# Altium PCB STM32 Project 1B.PcbDoc
Units mm, origin at the board's own origin, x right, y up, seen from the top; angles counter-clockwise.
Board outline 45 x 45 mm, 2 copper layers (Top Layer, Bottom Layer), stack 0.695 mm thick; 47 components, 42 nets, 201 pads, 67 vias.
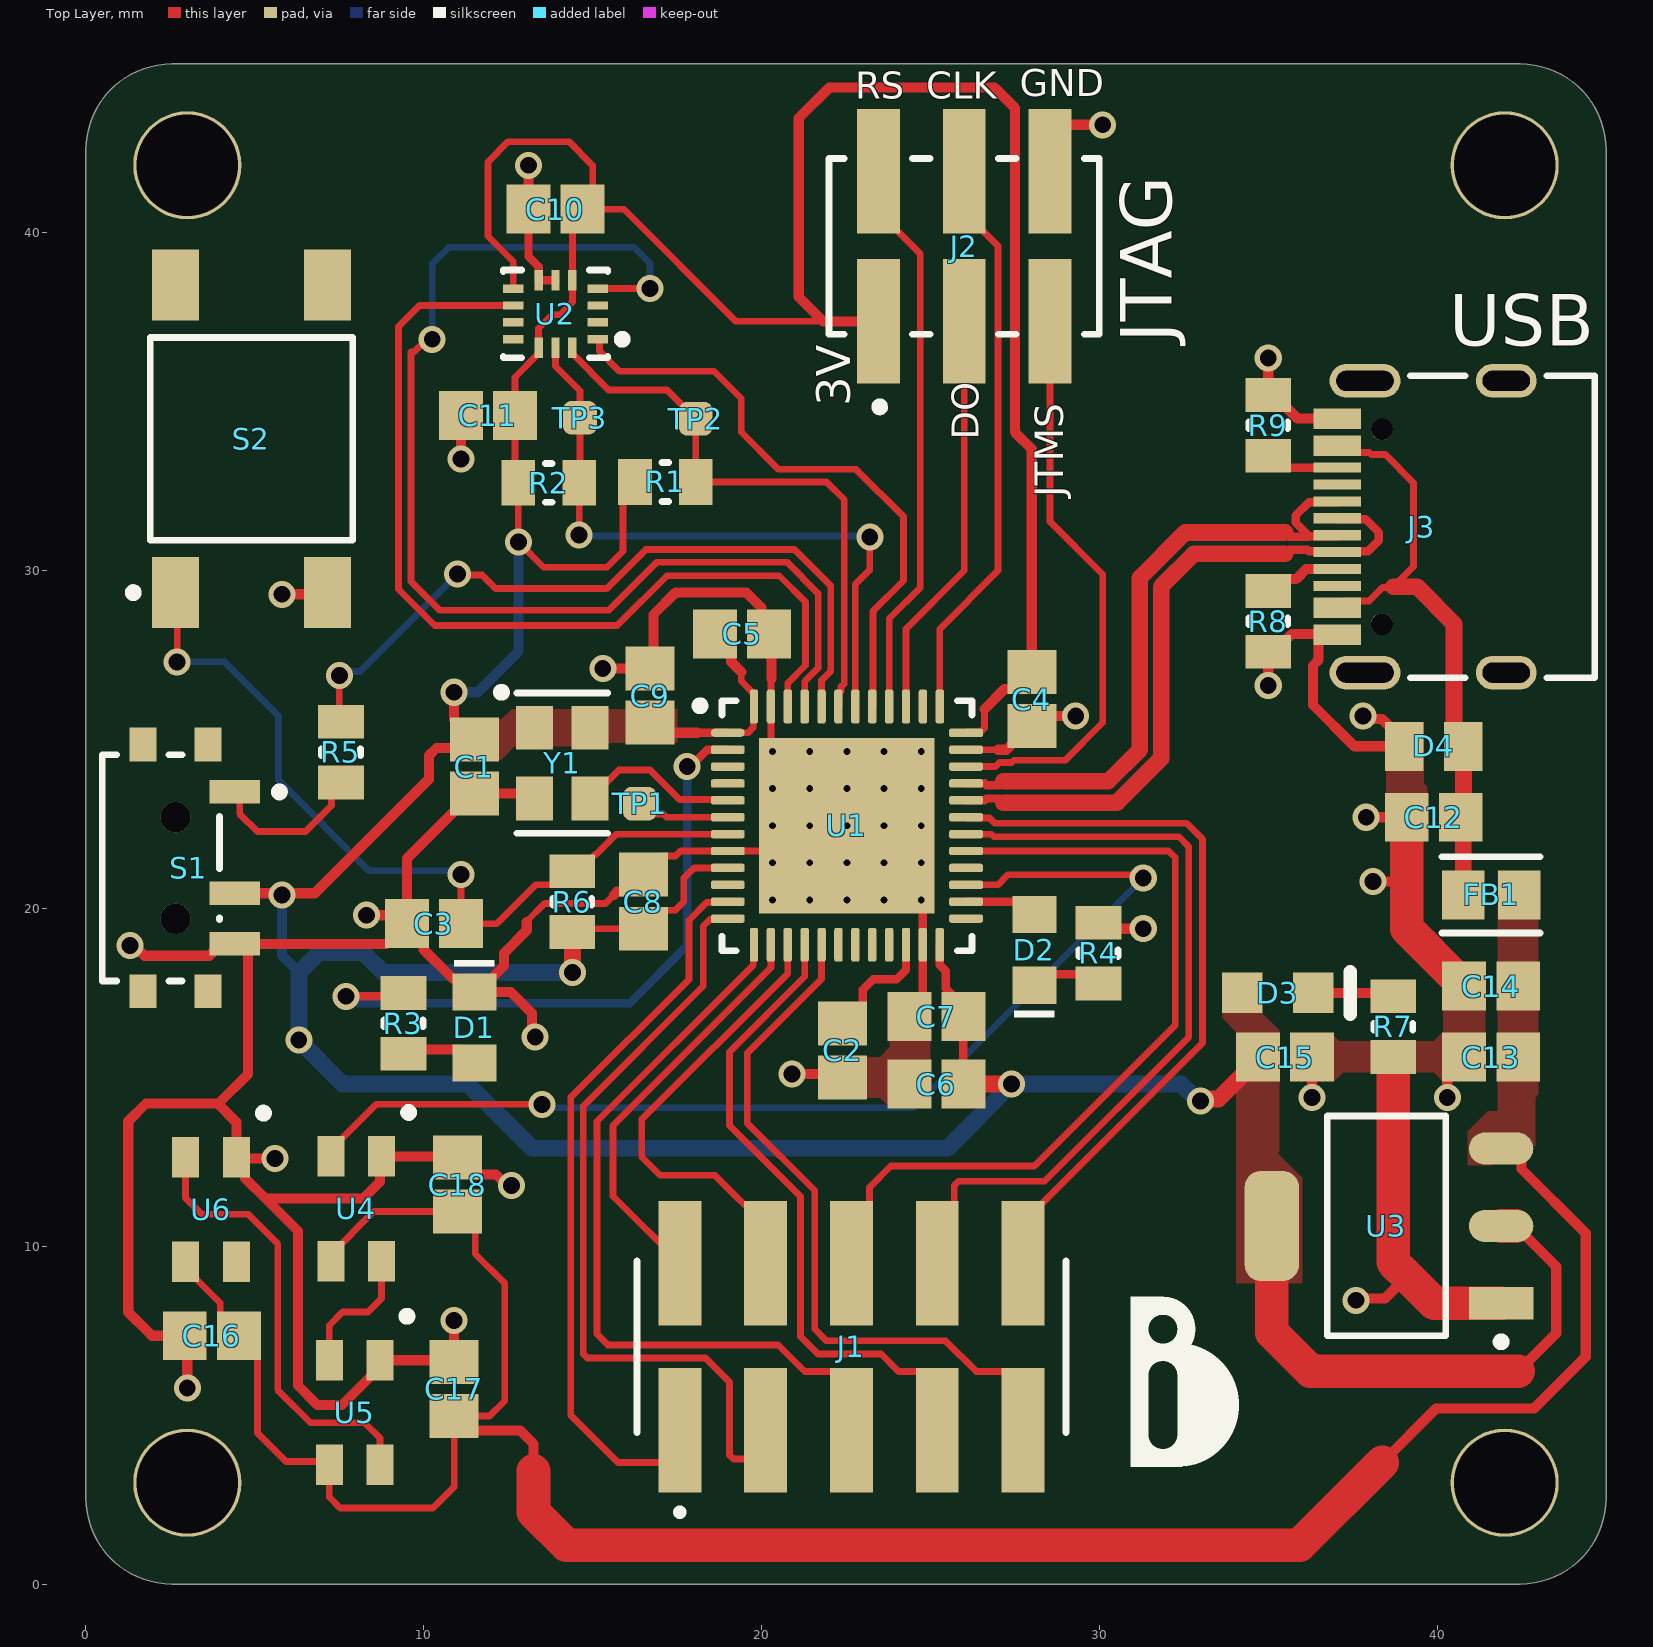
[diagram p0: Top Layer view]
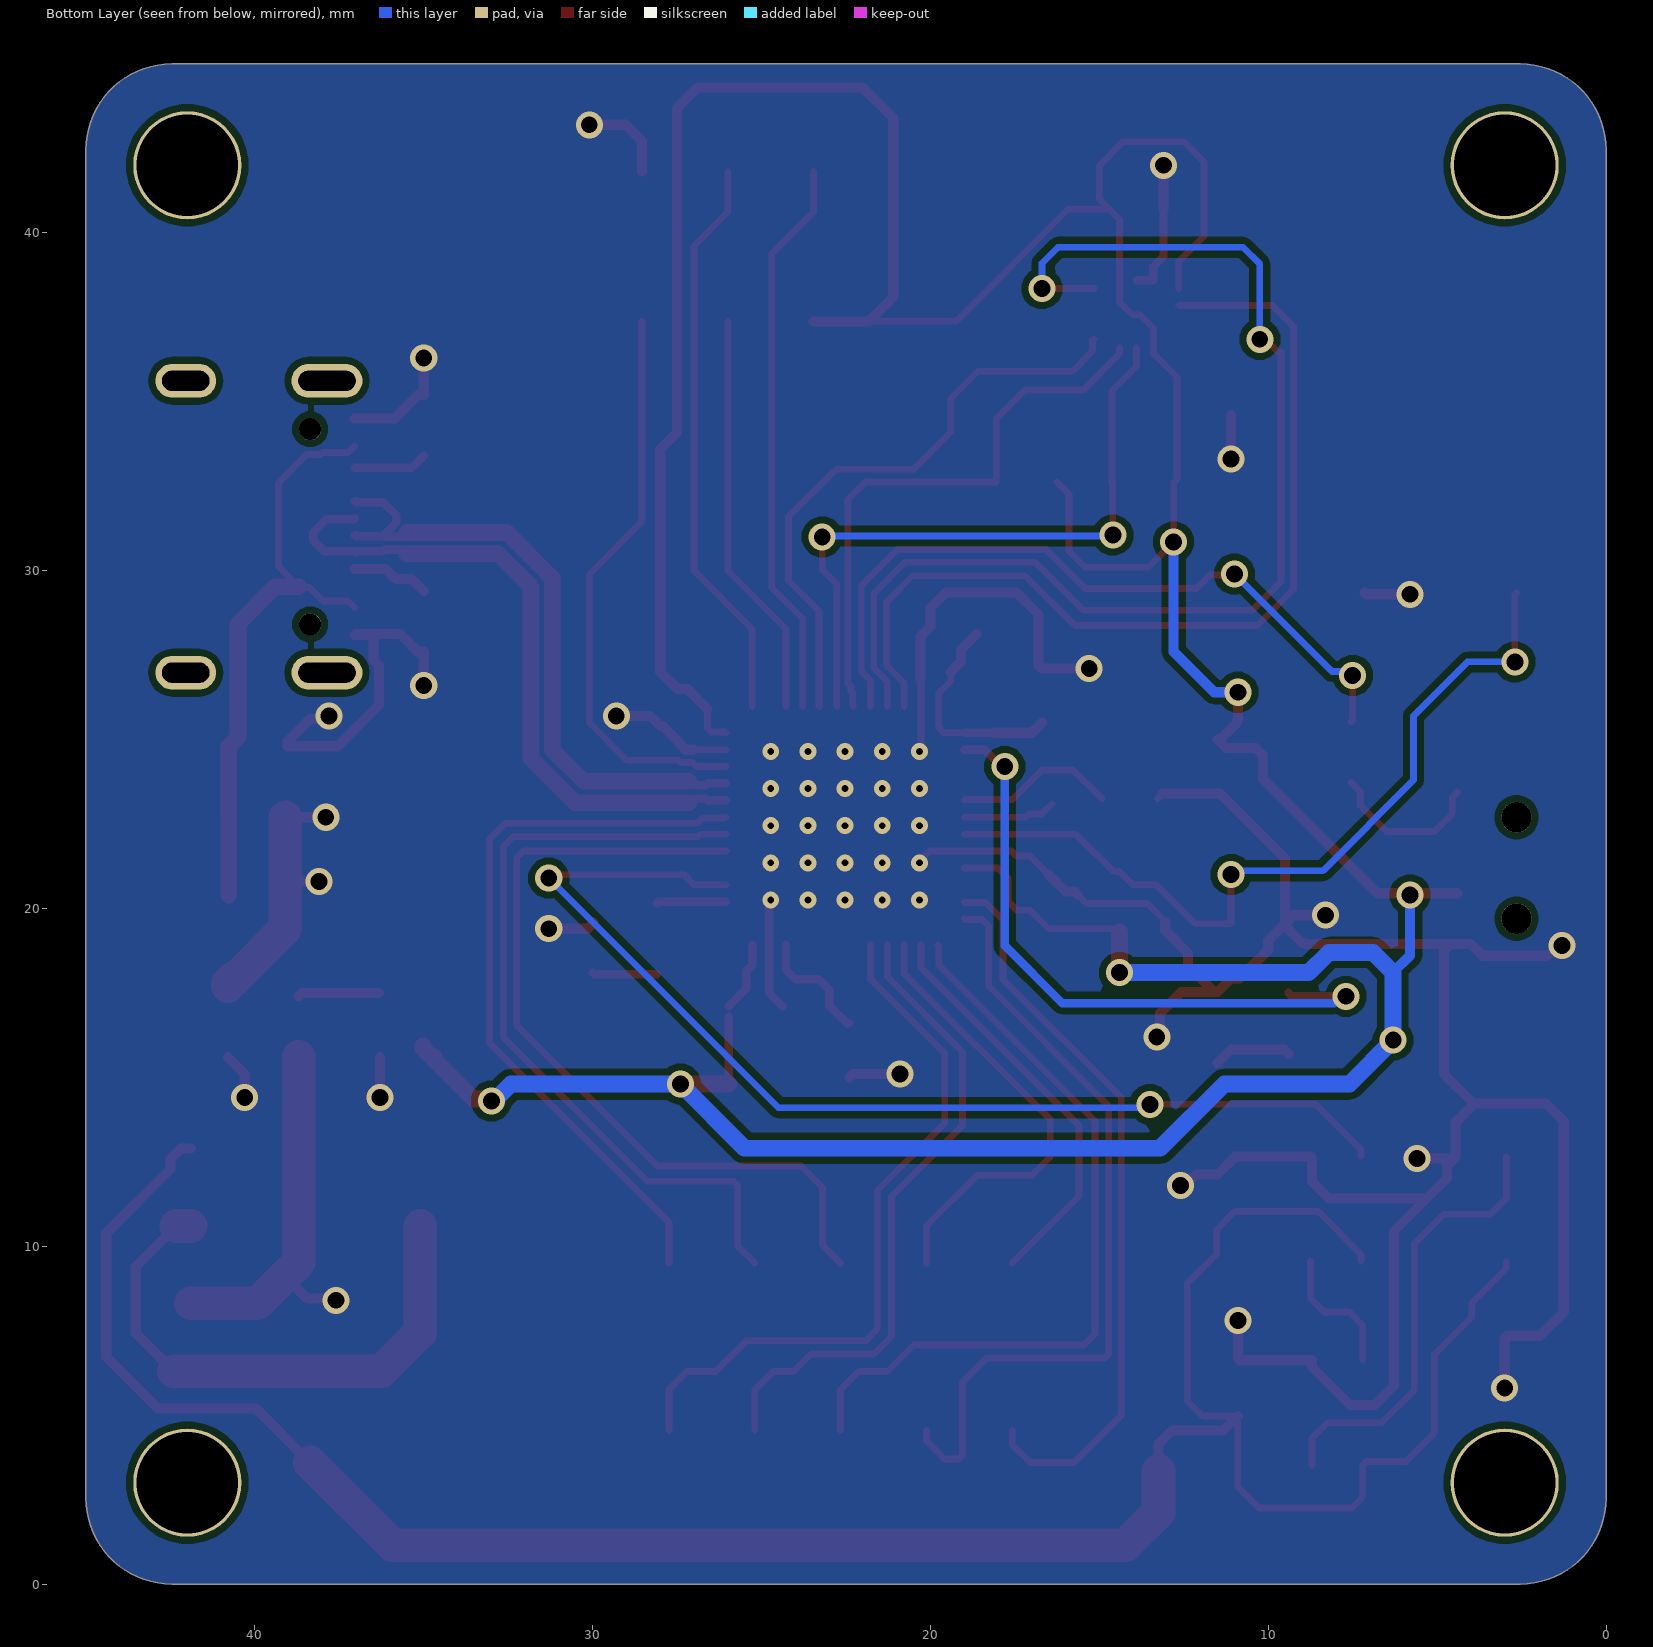
[diagram p1: Bottom Layer view, seen from below]
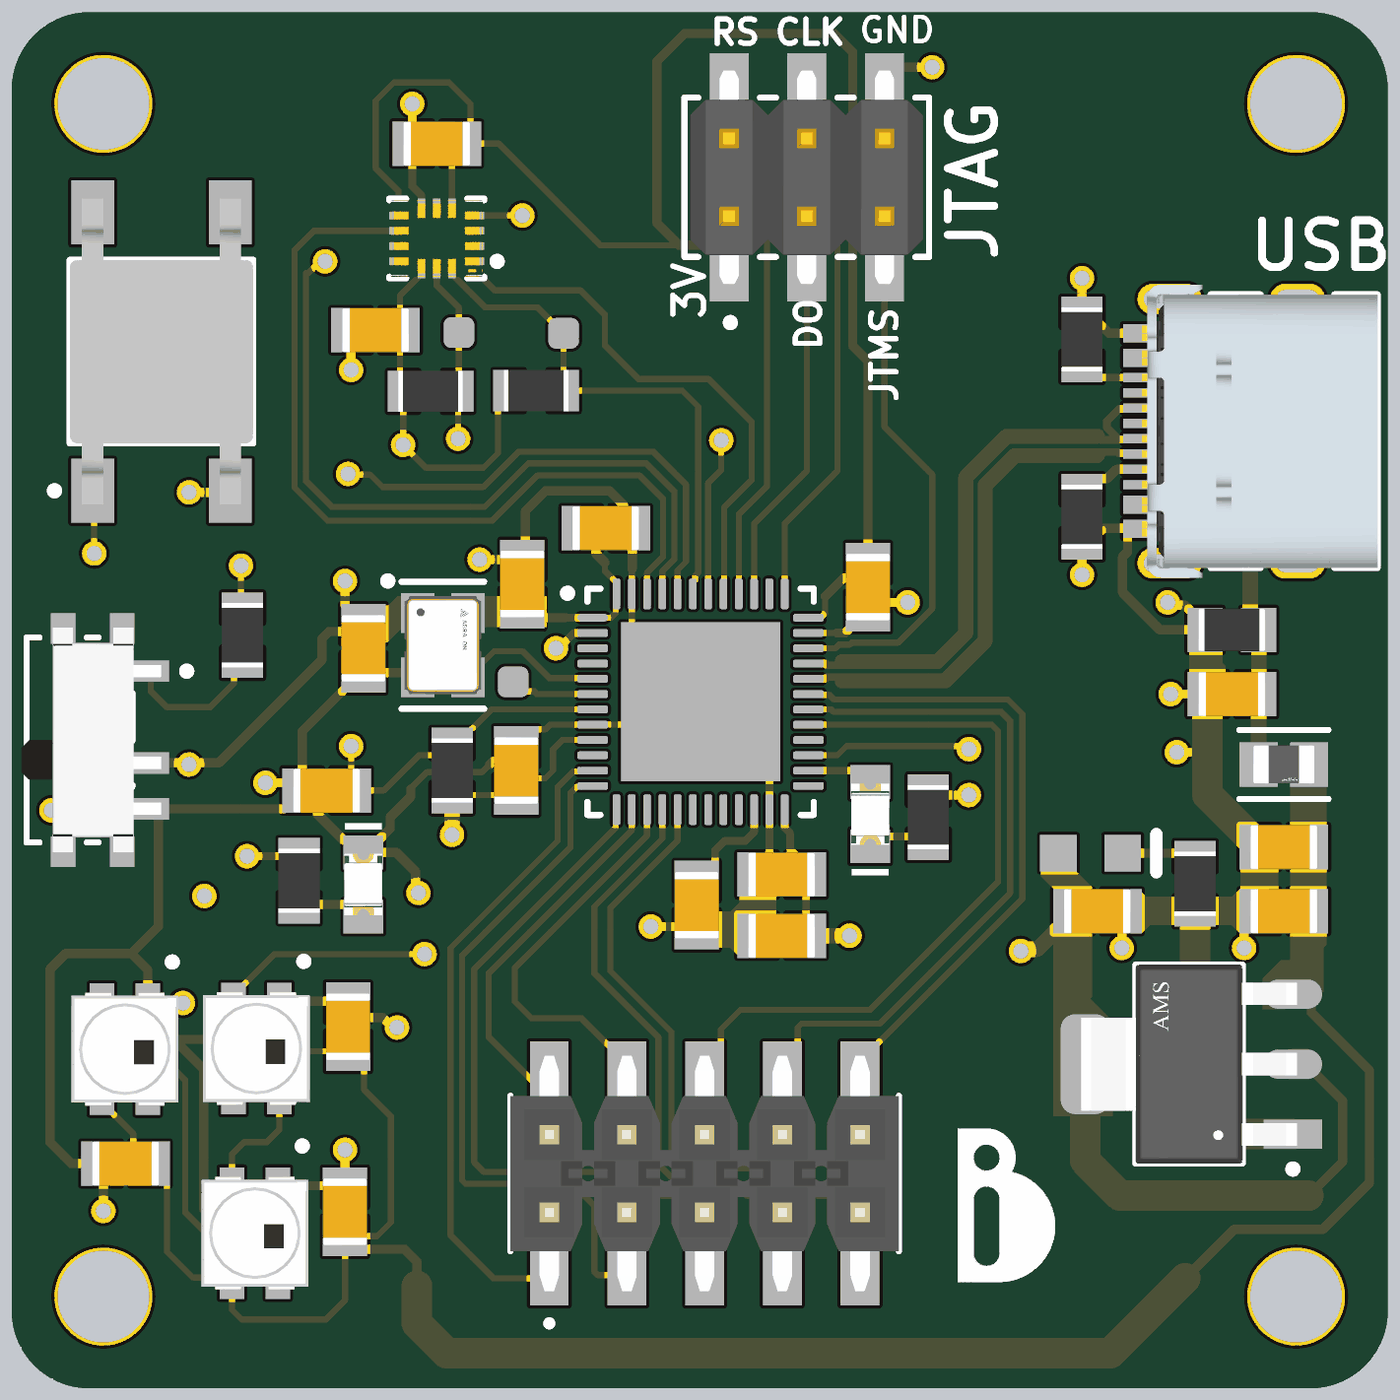
[diagram p2: 3D render of the assembled board from above, using the file's embedded part models]

## Layer stack, top to bottom
Top Solder: solder mask 0.0102, Solder Resist, Dk 4.6
Top Layer: signal copper 0.0152
Dielectric 1: dielectric 0.665, FR-4, Dk 4.6
Bottom Layer: signal copper 0.0152
Bottom Solder: solder mask 0.0102, Solder Resist, Dk 4.6

## Board outline
0,2.54 0,42.46 cw(c2.54,42.46) 2.54,45 42.46,45 cw(c42.46,42.46) 45,42.46 45,2.54 cw(c42.46,2.54) 42.46,0 2.54,0 cw(c2.54,2.54)

## Design rules (kind name [scope] priority, off if disabled: settings)
Clearance [All] p1: gap=0.2 ignorepadtopadclearanceinfootprint=TRUE except(0.127: Arc-Arc Arc-Track Track-Track SMDPad-SMDPad; 0.33: Arc-Hole Track-Hole)
DiffPairsRouting [All] p1: maxlimit=0.14 minlimit=0.14 mostfreqgap=0.14 toplayer_minwidth=0.25 toplayer_maxwidth=0.49 toplayer_prefwidth=0.49 bottomlayer_minwidth=0.25 bottomlayer_maxwidth=0.49 bottomlayer_prefwidth=0.49 impedanceprofiledriven=TRUE impedanceprofileid={F4CBB084-590F-4738-A755-8F10FD4772D8} impedanceprofilevalue=90.000000 maxuncoupledlength=12.7
HoleSize [All] p1: absolutevalues=TRUE maxlimit=5 minlimit=0.025 maxpercent=80.000 minpercent=20.000
MinimumSolderMaskSliver [All] p1: minsoldermaskwidth=0.04
PlaneConnect [All] p1: planeconnectstyle=Direct reliefexpansion=0.508 reliefentries=4 reliefconductorwidth=0.254 reliefairgap=0.254
PolygonConnect [All] p1: connectstyle=Direct reliefconductorwidth=0.254 reliefentries=4 polygonreliefangle="90 Angle" airgapwidth=0.254
RoutingVias [All] p1: holewidth=0.711 width=1 viastyle="Through Hole" minholewidth=0.5 minwidth=0.8 maxholewidth=1 maxwidth=1.5
SilkToSolderMaskClearance [IsPad] p1: minsilkscreentomaskgap=0.1 clearancetoexposedcopper=TRUE
SolderMaskExpansion [All] p1: expansion=0.102 istentingtop=FALSE
SupplyNets "Schematic Supply Nets_3" [InNet('+3V3')] p1: voltage=0.000
SupplyNets "Schematic Supply Nets_2" [InNet('GND')] p2: voltage=0.000
SupplyNets "Schematic Supply Nets_1" [InNet('VBUS')] p3: voltage=0.000
SupplyNets "Schematic Supply Nets" [InNet('+5V')] p4: voltage=0.000
UnRoutedNet [All] p1: checkbadconnections=TRUE
Width [All] p1: maxlimit=1 minlimit=0.2 preferedwidth=0.3 minimp=50.000000 maximp=50.000000 favimp=50.000000
24 further rules are at their usual default settings.

## Classes and differential pairs
differential pair USB_D: +USB_D_P -USB_D_N

## Components (designator, comment, footprint, x,y, rotation, side; value= is the part's Value field where it differs from the comment)
C1 "100n" CAP_0805 11.5,24.2 r90 top
C2 "2u2" CAP_0805 22.4,15.8 r90 top
C3 "100n" CAP_0805 10.3,19.55 r0 top
C4 "100n" CAP_0805 28,26.2 r90 top
C5 "100n" CAP_0805 19.425,28.125 r180 top
C6 "4.7u" CAP_0805 25.177,14.8 r0 top
C7 "100n" CAP_0805 25.177,16.8 r0 top
C8 "100n" CAP_0805 16.5,20.2 r270 top
C9 "100n" CAP_0805 16.7,26.3 r270 top
C10 "100n" CAP_0805 13.9,40.7 r0 top
C11 "100n" CAP_0805 11.9,34.6 r0 top
C12 "2u2" CAP_0805 39.9,22.7 r0 top
C13 "2u2" CAP_0805 41.6,15.6 r0 top
C14 "22u" CAP_0805 41.6,17.7 r0 top
C15 "22u" CAP_0805 35.5,15.6 r180 top
C16 "100n" CAP_0805 3.725,7.35 r0 top
C17 "100n" CAP_0805 10.9,5.775 r270 top
C18 "100n" CAP_0805 11,11.825 r270 top
D1 "LED_RED_0805" LED_RED_0805 11.5,16.475 r270 top
D2 "LED_RED_0805" LED_RED_0805 28.075,18.775 r90 top
D3 "LED_GREEN" LED_GREEN_0805 35.28,17.5 r0 top
D4 "TVS_0805" TVS_0805 39.9,24.8 r0 top value=0.05pF
FB1 "120R" FERRITE_BEAD_0805 41.6,20.4 r0 top
J1 "PIN EXTENDER" 10P_2x5_HEADER 22.66,7.025 r180 top
J2 "JTAG" 6P_2x3_HEADER 26,39.6 r0 top
J3 "USB-C" "USB-C SMD 16 Pin" 40.9,31.3 r90 top
R1 "2K2" RES_0805 17.15,32.625 r0 top
R2 "2K2" RES_0805 13.7,32.6 r0 top
R3 "1K" RES_0805 9.4,16.6 r270 top
R4 "1K" RES_0805 29.975,18.675 r270 top
R5 "10K" RES_0805 7.55,24.625 r90 top
R6 "10K" RES_0805 14.4,20.2 r90 top
R7 "1K" RES_0805 38.7,16.5 r90 top
R8 "5K1" RES_0805 35,28.5 r270 top
R9 "5K1" RES_0805 35,34.3 r90 top
S1 "SLIDE_SWITCH_SPDT" SLIDE_SWITCH_SPDT 1.9,21.2 r270 top
S2 "PUSH_BUTTON" PUSH_BUTTON 4.9,33.9 r180 top
TP1 "OSC_TP" TEST_POINT_SMD 16.4,23.1 r0 top
TP2 "SDA_TP" TEST_POINT_SMD 18.05,34.5 r90 top
TP3 "SCL_TP" TEST_POINT_SMD 14.625,34.525 r90 top
U1 "STM32F411CEU6" STM32F411CEU6 22.527,22.45 r0 top
U2 "BMI160" BMI160 13.9,37.6 r180 top
U3 "AMS1117-3.3" AMS1117-3.3 38.5,10.6 r180 top
U4 "SK6812-3535" SK6812-3535 8.053,11.061 r270 top
U5 "SK6812-3535" SK6812-3535 8.003,5.026 r270 top
U6 "SK6812-3535" SK6812-3535 3.753,11.041 r270 top
Y1 "25MHz" XTAL_OSCILLATOR_25MHz 14.1,24.3 r270 top

## Footprints (in the part's own frame and the unit in brackets; to place one, negate y for a bottom-side part, rotate by r counter-clockwise, add the part's x,y. Pads: shape width x height; smd on the part's side, far side on the other; paste and mask are expansions set on the pad)
6P_2x3_HEADER [mm] "Male Header, Pitch 2.54 mm, 2 x 3 Position, Height 8.13 mm, -65 to 125 degC, RoHS, Tube"
  rect 1.27x3.68 smd paste+0 mask+0: 1(-2.54,-2.22) 2(-2.54,2.22) 3(0,-2.22) 4(0,2.22) 5(2.54,-2.22) 6(2.54,2.22)
  silkscreen extent -4,-4.87 4,2.61, body extent -4.1,-4.16 4.1,4.16, height 0.25
10P_2x5_HEADER [mm] "10 Position SMD Pin Header 2x5"
  rect 1.27x3.68 smd: 1(5.08,2.475) 2(5.08,-2.475) 3(2.54,2.475) 4(2.54,-2.475) 5(0,2.475) 6(0,-2.475) 7(-2.54,2.475) 8(-2.54,-2.475) 9(-5.08,2.475) 10(-5.08,-2.475)
  silkscreen extent -6.35,-2.54 6.35,5, body extent -6.35,-3.85 6.35,3.85, height 9.91
AMS1117-3.3 [mm] "LDO Voltage Regulators 1A, 3.3V"
  rect 1.905x0.952 smd paste+0 mask+0: 1(-3.395,2.29)
  rrect100% 1.905x0.952 smd paste+0 mask+0: 2(-3.395,0) 3(-3.395,-2.29)
  rrect59% 1.604x3.262 smd paste+0 mask+0: 4(3.395,0)
  silkscreen extent -3.52,-3.25 1.75,3.55, body extent -4.7,-3.75 4.7,3.75, height 0.25
BMI160 [mm] "IMU ACCEL/GYRO I2C/SPI 14LGA"
  rect 0.6x0.25 smd paste+0 mask+0: 1(-1.25,0.75) 2(-1.25,0.25) 3(-1.25,-0.25) 4(-1.25,-0.75) 8(1.25,-0.75) 9(1.25,-0.25) 10(1.25,0.25) 11(1.25,0.75)
  rect 0.25x0.6 smd paste+0 mask+0: 5(-0.5,-1) 6(0,-1) 7(0.5,-1) 12(0.5,1) 13(0,1) 14(-0.5,1)
  silkscreen extent -2.1,-1.3 1.55,1.3, body extent -2.05,-1.8 2.05,1.8, height 0.25
CAP_0805 [mm] "Chip Capacitor, 2-Leads, Body 2.00x1.25mm, IPC Medium Density"
  rect 1.3x1.45 smd: 1(-0.8,0) 2(0.8,0)
  body extent -1.1,-0.72 1.1,0.72, height 1
FERRITE_BEAD_0805 [mm] "FERRITE BEAD 120 OHM 0805 1LN"
  rect 1.255x1.456 smd paste+0 mask+0: 1(-0.826,0) 2(0.826,0)
  silkscreen extent -1.45,-1.13 1.45,1.13, body extent -1.7,-0.98 1.7,0.98, height 0.25
LED_GREEN_0805 [mm] "SMD, 2-Leads, Body 2x1.25mm, Height 0.8mm"
  rect 1.2x1.2 smd: 1(-1.05,0) 2(1.05,0)
  silkscreen extent 2.15,-0.63 2.15,0.63, body extent -1,-0.63 1,0.63, height 0.8
LED_RED_0805 [mm] "SMD Mono-color Chip LED, body 2.0x1.25mm"
  rect 1.1x1.3 smd: 1(-1.05,0) 2(1.05,0)
  silkscreen extent -2,-0.6 -1.8,0.6, body extent -1,-0.63 1,0.62, height 0.7
PUSH_BUTTON [mm] "SMD, 4-Leads, Body 6x6mm, Pitch 4.5mm"
  rect 1.4x2.1 smd: 1(2.25,4.55) 2(2.25,-4.55) 3(-2.25,4.55) 4(-2.25,-4.55)
  silkscreen extent -3,-3 3.62,4.67, body extent -3,-5 3,5, height 5.08
RES_0805 [mm] "Chip Resistor, 2-Leads, Body 2.00x1.25mm, IPC Medium Density"
  rect 1x1.35 smd: 1(-0.9,0) 2(0.9,0)
  silkscreen extent -0.1,-0.58 0.1,0.58, body extent -1.05,-0.67 1.05,0.67, height 0.6
SK6812-3535 [mm] "SMD, 4-Leads, Body 5x5mm"
  rect 1.2x0.8 smd: 1(-1.6,0.7) 2(-1.6,-0.8) 3(1.5,-0.8) 4(1.5,0.7)
  silkscreen extent -3.02,1.38 -2.78,1.63, body extent -1.9,-1.8 1.8,1.7, height 1.13
SLIDE_SWITCH_SPDT [mm] "SWITCH SLIDE SPDT 300MA 6V"
  rect 0.7x1.5 smd paste+0 mask+0: 1(-2.25,2.5) 2(0.75,2.5) 3(2.25,2.5)
  rect 1x0.8 smd paste+0 mask+0: 4(-3.65,1.715) 5(3.65,1.715) 6(-3.65,-0.215) 7(3.65,-0.215)
  round 0.9 hole 0.9 unplated paste-2539.97 mask+0: ""(-1.5,0.75) ""(1.5,0.75)
  silkscreen extent -3.35,-1.42 3.35,3.95, body extent -4.25,-1.39 4.25,4.11, height 0.25
STM32F411CEU6 [mm] "QFN, 48-Leads, Body 7.1x7.1mm, Pitch 0.5mm, Thermal Pad 5.6x5.6mm, IPC High Density"
  oval 1x0.25 smd: 1(-3.527,2.75)
  rrect50% 1x0.25 smd: 2(-3.527,2.25) 3(-3.527,1.75) 4(-3.527,1.25) 5(-3.527,0.75) 6(-3.527,0.25) 7(-3.527,-0.25) 8(-3.527,-0.75) 9(-3.527,-1.25) 10(-3.527,-1.75) 11(-3.527,-2.25) 12(-3.527,-2.75) 25(3.527,-2.75) 26(3.527,-2.25) 27(3.527,-1.75) 28(3.527,-1.25) 29(3.527,-0.75) 30(3.527,-0.25) 31(3.527,0.25) 32(3.527,0.75) 33(3.527,1.25) 34(3.527,1.75) 35(3.527,2.25) 36(3.527,2.75)
  rrect50% 0.25x1 smd: 13(-2.75,-3.527) 14(-2.25,-3.527) 15(-1.75,-3.527) 16(-1.25,-3.527) 17(-0.75,-3.527) 18(-0.25,-3.527) 19(0.25,-3.527) 20(0.75,-3.527) 21(1.25,-3.527) 22(1.75,-3.527) 23(2.25,-3.527) 24(2.75,-3.527) 37(2.75,3.527) 38(2.25,3.527) 39(1.75,3.527) 40(1.25,3.527) 41(0.75,3.527) 42(0.25,3.527) 43(-0.25,3.527) 44(-0.75,3.527) 45(-1.25,3.527) 46(-1.75,3.527) 47(-2.25,3.527) 48(-2.75,3.527)
  rect 5.2x5.2 smd: 49(0,0)
  silkscreen extent -4.47,-3.7 3.7,3.7, body extent -3.55,-3.55 3.55,3.55, height 0.6
TEST_POINT_SMD [mm] "Test Point SMD Generic - for in circuit test"
  rrect50% 1x1 smd: 1(0,0)
TVS_0805 [mm] "Chip Diode, 2-Leads, Body 2.00x1.25mm, IPC Medium Density"
  rect 1.15x1.45 smd: 1(-0.875,0) 2(0.875,0)
  body extent -1.1,-0.7 1.1,0.7, height 1.2
"USB-C SMD 16 Pin" [mm] "USB TYPE C VERTICAL PLUG"
  rect 0.6x1.4 smd: A1/B12(-3.2,3.859) A4/B9(-2.4,3.859) A9/B4(2.4,3.859) A12/B1(3.2,3.859)
  rect 0.3x1.4 smd: A5(-1.25,3.859) A6(-0.25,3.859) A7(0.25,3.859) A8(1.25,3.859) B5(1.75,3.859) B6(0.75,3.859) B7(-0.75,3.859) B8(-1.75,3.859)
  round 0.65 hole 0.65 unplated: MH1(-2.89,2.535) MH2(2.89,2.535)
  oval 1x1.8 hole 0.6 slot 1.4 at 90 deg: Shell(-4.32,-1.145) Shell(4.32,-1.145)
  oval 1x2.1 hole 0.6 slot 1.7 at 90 deg: Shell(-4.32,3.035) Shell(4.32,3.035)
  silkscreen extent -4.47,-3.76 4.47,1.7, body extent -4.79,-3.76 4.79,3.95, height 3.33
XTAL_OSCILLATOR_25MHz [mm] "XTAL Oscillator 25MHz ±50ppm CMOS 3.3V 4-SMD 3.2mm x 2.5mm"
  rect 1.3x1.1 smd paste+0 mask+0: 1(-1.05,-0.825) 2(1.05,-0.825) 3(1.05,0.825) 4(-1.05,0.825)
  silkscreen extent -2.22,-1.92 2.07,1.35, body extent -1.8,-1.48 1.8,1.48, height 0.25

## Part data
C1 C2 C3 C4 C5 C6 C7 C8 C9 C10 C11 C12 C13 C14 C15 C16 C17 C18: library part CAP_0805, "Capacitor SMD 0805 Generic"
D1 D2: "Chip LED, Green, 2.2 V, -40 to 85 degC, 2-Pin SMD, Pb-Free, Tape and Reel", Case Code (Imperial)=0805, Case Code (Metric)=2012, Color=Red, Forward Current=100mA, Forward Voltage=2V, Max Operating Temperature=85°C, Max Reverse Voltage (DC)=5V, Min Operating Temperature=-40°C, Test Current=20mA, Case/Package=0805, Dominant Wavelength=625nm, Height=700µm, Length=2mm, Lens Style="Clear, Rectangular", Luminous Intensity=150mcd, Mount="Surface Mount", NexarPartId=29717781, Packaging="Tape and Reel", Peak Wavelength=630nm, REACH SVHC=Unknown, RoHS=Compliant, Viewing Angle=140°, Wavelength=625nm, Width=1.25mm
D3: library part LED_GREEN_0805, "Chip LED, Green, 2.2 V, -40 to 85 degC, 2-Pin SMD, Pb-Free, Tape and Reel", Forward Current If=20mA, Forward Voltage=2.2V, Forward Voltage VF Max=2.6V, LED Colour=Green, Manufacturer=Avago, Operating Temperature Max=85degC, Operating Temperature Min=-30degC, Operating Temperature Range=-30degCto+85degC, Opto Case Style=SMD, Package Description="2-Pin Surface Mount Device, Body 2 x 1.25 mm, Height 0.8 mm", Package Reference=HSMX-C170, Storage Temperature Min=-40degC, Bulb Size=1.25mmx1.4mm, Datasheet URL=https://datasheet.ciiva.com/29280/180495-da-01-en-chip-led-hsmg-c170-gelb-gruen-29280971.pdf, Datasheet Version=Oct-08, Dominant Wavelength=572nm, Dominant Wavelength Typ=572nm, External Depth=0.8mm, External Length / Height=2mm, External Width=1.25mm, Forward Current If Max=20mA, LED Mounting=SMD, LED Type=Standard, Lens Shape=Rectangular, Light Area Height=1mm, Luminous Intensity=15mcd, Luminous Intensity Min=4mcd, Luminous Intensity Typ=15mcd, Manufacturer URL=http://www.avagotech.com/, Mounting Type=SMD, MSL=MSL2A-4weeks, No. of Pins=2, Opto Mounting Orientation=Top, Packaging=CutTape, Peak Forward Current=20mA, Peak Wavelength=570nm, PIV Max=5V, Storage Temperature Max=85degC, SVHC=NoSVHC(16-Jun-2014), Viewing Angle=170deg, Voltage Vf Typ=2.2V, Wavelength Typ=570nm
D4: "ESD Suppressor SMD 0805", Capacitance=0.05pF, Clamping Voltage=100V, Manufacturer=Panasonic, Manufacturer Part Number=EZA-EG2A50AX, Package=EZAEG2A, Reverse Standoff Voltage=30V, Temperature="-55°C to +125°C", Temperature Range High=+125°C, Temperature Range Low=-55°C, Automotive=No, Category=Diode, ComponentLink2Description=Datasheet, ComponentLink2URL=https://industrial.panasonic.com/cdbs/www-data/pdf/AWD0000/AWD0000C23.pdf, Device Class L1="Circuit Protection", Device Class L2="TVS Diodes", Device Class L3=unset, Digikey Description="VARISTOR 0402", Direction=Bidirectional, Height=0.43mm, Ipc Land Pattern Name=INDC10050X38, Lead Free=Yes, Mouser Description="ESD Suppressors 15V 0402 SUPPRESSOR ESD", Number Of Channels=1, Octopart=https://octopart.com/eza-eg2a50ax-panasonic-39557977, RoHS=TRUE
FB1: library part FERRITE_BEAD_0805, "FERRITE BEAD 120 OHM 0805 1LN", Case Code (Imperial)=0805, Case Code (Metric)=2012, Current Rating=800mA, DC Current=200mA, DC Resistance (DCR)=100mR, Frequency=100MHz, Max Current Rating=1A, Max Operating Temperature=125°C, Min Operating Temperature=-55°C, Package Quantity=1, Resistance=150mR, Tolerance=25%, Case/Package=0805, Core Material=Ferrite, DC Resistance-Max=100mR, Depth=1.25mm, Height=0.85mm, Impedance=120R, Lead Free="Lead Free", Length=2mm, Material=Steel, Max DC Current=200mA, Military Standard=Not, Number of Circuits=1, Number of Lines=1, Number of Pins=2, Packaging="Tape and Reel", Radiation Hardening=No, REACH SVHC="No SVHC", Series=BLM21A, Shielding=Unshielded, Termination=SMD/SMT, Test Frequency=100MHz, Width=1.25mm
J1: library part 10P_2x5_HEADER, "10 Position SMD Pin Header 2x5"
J2: library part 6P_2x3_HEADER, "Male Header, Pitch 2.54 mm, 2 x 3 Position, Height 8.13 mm, -65 to 125 degC, RoHS, Tube", Max Operating Temperature="150 degC", Max Supply Voltage="5.5 V", Min Operating Temperature="-40 degC", Min Supply Voltage="4.5 V", Nominal Supply Voltage="5 V", Package Quantity=3000, ComponentLink1Description="Manufacturer URL", ComponentLink1URL=http://www.te.com/, ComponentLink2Description=Datasheet, ComponentLink2URL=http://www.te.com/commerce/DocumentDelivery/DDEController?Action=showdoc&DocId=Customer+Drawing%7F146130%7FM%7Fpdf%7FEnglish%7FENG_CD_146130_M.pdf%7F5-146130-2, DatasheetVersion=Oct-15, Mount="Surface Mount", PackageDescription="Male Header, Pitch 2.54 mm, 2 x 3 Position, Height 8.13 mm", PackageReference=5-146130-2, Packaging="Tape and Reel", Pins=3, Radiation Hardening=No, RoHSCompliant=true
J3: library part "USB-C SMD 16 Pin", "Usb Conn, 2.0 Type C, R/A Rcpt, 16P, Smt Rohs Compliant: Yes", Current Rating=5A, Insulation Resistance=100MR, Manufacturer="Wurth Electronics", Manufacturer Part Number=629722000214, Max Operating Temperature=85°C, Min Operating Temperature=-40°C, Supplier Part Number=69AK2245, Voltage Rating=20V, ComponentLink1Description=https://datasheet.octopart.com/629722000214-Wurth-Elektronik-datasheet-168263062.pdf?src-supplier=Element14, ComponentLink1URL=https://datasheet.octopart.com/629722000214-Wurth-Elektronik-datasheet-168263062.pdf?src-supplier=Element14, Contact Material=Nickel,Gold, Gender=Receptacle, Height=3.51mm, Number of Contacts=12, Packaging="Tape and Reel", Pin Length=950um, Pins=16, Pricing="1=4.22, 10=3.98, 25=3.76, 50=3.47, 100=3.17, 250=2.8 (USD)", RoHS=No, Stock=1749, Supplier=Newark, USB Standard="USB 2.0"
R1 R2 R3 R4 R5 R6 R7 R8 R9: library part RES_0805, "Resistor SMD 0805 Generic"
S1: "SWITCH SLIDE SPDT 300MA 6V", Max Current=300mA, Max Voltage=6V
S2: "Micro Miniature Push Button Switch FSM JSM, 50 mA, -35 to 85 degC, 4-Pin SMD, RoHS, Tape and Reel", Capacitance=0f, Case\/Package=SMD/SMT, Contact Current Rating=50mA, Contact Resistance=100mOhm, Manufacturer="TE Connectivity", Max Operating Temperature=85degC, Max Voltage Rating (DC)=12V, Min Operating Temperature=-35degC, Operating Force=160gf, Package Description="4-Pin Surface Mount Device, Body 6 x 6 mm, Pitch 4.5 mm", Package Quantity=1200, Package Reference=FSM4JSMATR, Voltage Rating (DC)=24V, Actuator Length=0.055inch, Actuator Material=Polyamide, Contact Material=CopperAlloy, Contact Plating=Silver, Current Rating=50mA, Datasheet URL=http://www.te.com/commerce/DocumentDelivery/DDEController?Action=showdoc&DocId=Customer+Drawing%7F2-1437565-7%7FV%7Fpdf%7FEnglish%7FENG_CD_2-1437565-7_V.pdf%7F4-1437565-2, Datasheet Version="Rev. V, 02/2015", Electrical Life=100000Cycles, Illumination Type=Illuminated, Manufacturer URL=http://www.te.com/, Mechanical Life=100000Cycles, Mount=SurfaceMount, Mounting Technology=SurfaceMount, Orientation=Straight, Packaging=TapeandReel, REACH SVHC=Unknown, RoHSCompliant=true, Switch Travel=0.25mm, Termination=GullWing, Throw Configuration=SPST
TP1 TP2 TP3: library part TEST_POINT_SMD, "Test Point SMD Generic - for in circuit test"
U1: "ARM Cortex-M4 32-bit MCU+FPU, 512 KB Flash, 128 KB RAM, 36 I/Os, 48-Pin UFQFPN, -40 to 85 degC, Tray", I/Os (High Current)=36, Operating Frequency(F) (Processor speed) (MHz)=100, Package Description=UFQFPN48, Package Reference="48-Pin Ultra Thin Fine Pitch Quad Flat No-Lead, 7 x 7 x 0.6 mm Body, 0.5 mm Pitch, Exposed Pad", Supply Voltage(Vcc) min (V)=1.7, ComponentLink1Description="Manufacturer URL", ComponentLink1URL=http://www.st.com/, ComponentLink2Description=Datasheet, ComponentLink2URL=http://www.st.com/st-web-ui/static/active/en/resource/technical/document/datasheet/DM00115249.pdf, Core="ARM Cortex-M4", DatasheetVersion="Rev. 6", FLASH Size (Prog) (kB)=512, Internal RAM Size (kB)=128, Mounting Technology="Surface Mount", Packing=Tray
U2: "IMU ACCEL/GYRO I2C/SPI 14LGA", Case/Package=LGA, Max Operating Temperature=85°C, Min Operating Temperature=-40°C, Lead Free="Lead Free", Mount="Surface Mount", Output Type=SPI, Packaging="Cut Tape", Sensor Type=Accelerometer
U3: "LDO Voltage Regulators 1A, 3.3V", Dropout Voltage=1.1V, Manufacturer="Advanced Monolithic Systems", Max Junction Temp=+125°C, Max Power Dissipation=1.2W, Max Supply Voltage=15V, Nominal Supply Current=5mA, Output Current=1A, Output Voltage=3.3V, Package=AMS1117, Temperature="-40°C to +125°C", Temperature Range Low=-40°C, Automotive=No, Category=IC, ComponentLink2Description=Datasheet, ComponentLink2URL=http://www.advanced-monolithic.com/pdf/ds1117.pdf, Device Class L1="Integrated Circuits (ICs)", Device Class L2="Power Management ICs", Device Class L3="Voltage Regulators - Linear", Height=1.8mm, Ipc Land Pattern Name=SOT229P700X180-4, Lead Free=Yes, Manufacturer Part Number=AMS1117-3.3, Number Of Outputs=1, Octopart=https://octopart.com/ams1117-3.3-advanced+monolithic+systems-25899300, Output Type=Fixed, RoHS=TRUE, Standoff Height=0.64mm, Temperature Range High=+125°C
U4 U5 U6: "NeoPixel 5050 RGB LED with Integrated Driver Chip - 10 Pack", Color=Blue,Green,Red, Manufacturer="Adafruit Industries", Manufacturer Part Number=1655, Max Operating Temperature=85°C, Min Operating Temperature=-40°C, Supplier Part Number=1528-1104-ND, Category=LEDs, ComponentLink1Description=http://www.mouser.com/ds/2/737/SK6812_LED_datasheet_-953546.pdf?src-supplier=Mouser, ComponentLink1URL=http://www.mouser.com/ds/2/737/SK6812_LED_datasheet_-953546.pdf?src-supplier=Mouser, ComponentLink2Description=https://cdn-shop.adafruit.com/product-files/1138/SK6812+LED+datasheet+.pdf?src-supplier=Digikey, ComponentLink2URL=https://cdn-shop.adafruit.com/product-files/1138/SK6812+LED+datasheet+.pdf?src-supplier=Digikey, Height=1.6mm, Interface=Serial, Length=5mm, Mounting Technology="Surface Mount", Number of LEDs=10, Pricing="1=4.5 (USD)", RoHS=Yes, Series=Neopixel, Stock=1730, Supplier=Digikey, Width=5mm
Y1: library part XTAL_OSCILLATOR_25MHz, "XTAL Oscillator 25MHz ±50ppm CMOS 3.3V 4-SMD 3.2mm x 2.5mm", Case/Package=SMD/SMT, Frequency Stability=50ppm, Load Capacitance=15pF, Max Operating Temperature=85°C, Max Supply Current=13mA, Max Supply Voltage=3.465V, Min Operating Temperature=-40°C, Min Supply Voltage=3.135V, Operating Frequency="25 MHz", Operating Supply Voltage=3.3V, Package Quantity=1000, Depth=2.5mm, Frequency=25MHz, Height=0.047inch, Lead Free="Lead Free", Length=3.2mm, Mount="Surface Mount", Number of Pins=4, Packaging="Tape and Reel", Radiation Hardening=No, Series=ASE, Termination=SMD/SMT, Width=2.5mm

## Free pads (board coordinates)
  round 3.2 hole 3: MH(3,3) MH(3,42) MH(42,3) MH(42,42)

## Via types
v1: diameter 0.8, hole 0.5, Top Layer to Bottom Layer, 42 vias
v2: diameter 0.5, hole 0.2, Top Layer to Bottom Layer, 25 vias

## Nets (pads, with @x,y where several pads share a name; then routed paths per layer and width w, separated by ;. In a path a pad name is that pad's centre, name@x,y a point inside that pad or via, vN(x,y) a via of type N, cw(c..) or ccw(c..) an arc to the next point about the centre after c; other vN are vias at no path point)
+3V3: C1.2 C4.2 C5.2 C6.2 C7.2 C8.2 C9.2 C10.2 C11.2 C15.2 D3.1 J2.1 R1.1 R2.1 R6.1 S1.2 U1.1 U1.9 U1.24 U1.36 U1.48 U2.5 U2.8 U2.12 U3.2 U3.4 Y1.1 Y1.4 | length 166.5
  Top Layer w0.2: U2.8 12.65,39.15 11.9,39.9 11.9,42.1 12.5,42.7 14.3,42.7 15,42 15,41 C10.2 ; R6.1 14.5,19.4 C8.2 17.05,19.95 17.45,19.95 17.7,20.2 17.7,20.9 18,21.2 U1.9 ; R1.1 15.9,32.275 15.9,30.575 15.425,30.1 13.55,30.1 v1(12.8,30.85) R2.1 12.7,32.7 C11.2 12.7,35.725 13.4,36.425 U2.12 13.4,37.175 13.8,37.575 14.025,37.575 14.4,37.95 U2.5 14.4,40.4 C10.2 ; U1.1 19.6,25.2 19.752,25.352 19.752,25.952 U1.48 19.752,26.002 19.752,26.377 19.4,26.729 19.4,27 ; 21.82,37.38 19.245,37.38 15.925,40.7 C10.2 ; U1.36 26.079,25.225 26.483,25.225 26.6,25.342 26.6,25.9
  Top Layer w0.25: 18.1,25.2 U1.1 ; U1.24 25.277,18.323 25.452,18.148 25.452,17.625 C7.2@25.977,17.1 ; C6.2 C7.2
  Top Layer w0.3: S1.2 6.775,20.45 10.15,23.825 10.15,24.525 10.375,24.75 11.25,24.75 C1.2 11.425,25 10.925,25.5 10.925,25.575 10.9,25.6 v1(10.9,26.4) ; C9.2 17,25.2 18.1,25.2 ; C5.2 19.1,27.65 19.1,27.3 19.4,27 ; J2.1 21.82,37.38 21.1,38.1 21.1,43.4 22,44.3 26.9,44.3 27.5,43.7 27.5,34.1 28,33.6 C4.2 27.5,26.5 27.2,26.5 26.6,25.9 ; U3.2@42.324,10.6 43.525,9.399 43.525,7.425 42.4,6.3
  Top Layer w0.5: v1(14.4,18.1) R6.1 ; C6.2 v1(27.4,14.8) ; v1(33,14.3) 33.057,14.357 33.532,14.357 35.024,15.849 C15.2@35.024,15.924 ; C15.2@34.7,15.525 C15.2
  Top Layer w1: U3.4 35.105,7.445 36.25,6.3 42.4,6.3 ; U3.2 U3.2@42.324,10.6
  Bottom Layer w0.3: v1(5.8,20.4) 5.8,18.614 6.307,18.107 ; v1(10.9,26.4) 11.6,26.4 12.8,27.6 v1(12.8,30.85)
  Bottom Layer w0.5: v1(14.4,18.1) 8.8,18.1 8.2,18.7 6.9,18.7 6.307,18.107 6.307,16.107 v1(6.3,16.1) 7.6,14.8 11.3,14.8 13.2,12.9 25.5,12.9 v1(27.4,14.8) 32.419,14.8 32.919,14.3 v1(33,14.3)
+5V: C13.2 C14.2 C16.2 C17.2 C18.2 FB1.2 U3.3 U4.3 U5.3 U6.3 | length 73.9
  Top Layer w0.2: U6.3 2.953,9.341 3.975,8.319 3.975,7.9 C16.2 5.075,6.8 5.075,4.475 5.925,3.625 7.104,3.625 U5.3 7.203,2.572 7.525,2.25 10.275,2.25 10.9,2.875 C17.2 11.95,4.975 12.4,5.425 12.4,8.9 11.525,9.775 11.525,10.5 C18.2 8.517,11.025 7.253,9.761 U4.3
  Top Layer w0.3: C17.2 11.325,4.55 12.85,4.55 13.25,4.15 13.25,3.35 ; 38.375,3.6 39.975,5.2 42.875,5.2 44.4,6.725 44.4,10.385 42.496,12.289 42.496,12.589 42.195,12.89 U3.3
  Top Layer w1: 13.25,3.35 13.25,2.125 14.225,1.15 35.925,1.15 38.375,3.6
ADDR_LED: U1.27 U4.2 | length 33.1
  Top Layer w0.2: U4.2 7.253,12.861 8.592,14.2 v1(13.5,14.2) ; U1.27 27,20.7 27.3,21 31.2,21 v1(31.3,20.9)
  Bottom Layer w0.2: v1(13.5,14.2) 13.6,14.1 24.5,14.1 v1(31.3,20.9)
GND: C1.1 C2.1 C3.1 C4.1 C5.1 C6.1 C7.1 C8.1 C9.1 C10.1 C11.1 C12.1 C13.1 C14.1 C15.1 C16.1 C17.1 C18.1 D1.1 D4.1 J2.6 J3.A1/B12 J3.A12/B1 R4.1 R7.1 R8.2 R9.2 S1.3 S2.3 U1.8 U1.23 U1.35 U1.47 U1.49 U2.6 U2.7 U3.1 U4.1 U5.1 U6.1 Y1.2 | length 143
  Top Layer w0.2: 13.05,19.6 13.05,19.62 13.58,20.15 15.38,20.15 15.63,20.4 ; Y1.2@13.125,23.4 Y1.2 ; C8.1 17.05,21.55 17.45,21.55 17.6,21.7 U1.8 20.027,21.7 20.327,21.4 v2(20.327,21.35) ; 20.292,26.792 20.277,26.777 U1.47 20.277,24.7 v2(20.327,24.65) ; U1.35 27,24.7
  Top Layer w0.25: C10.1 13.1,39.3 13.4,39 U2.7 U2.6 ; C7.1@24.377,17.1 24.777,17.5 U1.23 24.777,20.2 v2(24.727,20.25)
  Top Layer w0.3: v1(1.3,18.9) 1.435,18.9 1.735,18.6 3.65,18.6 4,18.95 S1.3@4.6,18.95 ; v1(3,5.8) 3,7.275 C16.1 1.95,7.35 1.851,7.449 1.25,8.05 1.25,13.7 1.775,14.225 3.9,14.225 ; v1(5.6,12.6) U6.1@4.494,12.6 ; v1(5.8,29.3) 7.1,29.3 S2.3 ; v1(8.3,19.8) 9.25,19.8 C3.1 ; v1(10.9,7.8) 10.9,6.677 10.849,6.626 U5.1 8.703,6.426 7.577,5.3 6.85,5.3 6.275,5.875 6.275,10.45 5.312,11.413 ; v1(11.1,33.3) C11.1 ; v1(12.6,11.8) 12.465,11.8 12.14,12.125 11.5,12.125 10.964,12.661 U4.1 8.7,12.608 8.7,11.9 8.213,11.413 5.312,11.413 ; 13.05,19.6 13.05,19.35 12.375,18.675 12.375,18.3 D1.1@11.6,17.525 ; C10.1 v1(13.1,42) ; Y1.2@13.125,23.4 C1.1 11.425,23.4 9.5,21.475 C3.1 ; v1(13.3,16.2) 13.204,16.296 13.204,16.896 12.575,17.525 D1.1@11.6,17.525 ; v1(15.3,27.1) C9.1 16.8,27.2 16.8,28.7 17.448,29.348 19.552,29.348 20,28.9 20,28.35 20.292,28.058 20.292,26.792 ; 15.63,20.4 15.73,20.5 16,20.5 C8.1 ; v1(20.9,15.1) 22.3,15.1 C2.1 ; 27,24.7 27.249,24.7 27.425,24.876 27.425,24.9 27.925,25.4 C4.1 28.3,25.7 v1(29.3,25.7) ; J2.6 28.54,42.715 29.025,43.2 v1(30.1,43.2) ; R4.1 30.15,19.4 v1(31.3,19.4) ; v1(35,26.6) R8.2 35.175,27.6 35.7,28.125 37.016,28.125 J3.A1/B12 36.641,28.1 36.491,27.95 36.491,27.358 36.325,27.192 36.325,26.025 37.55,24.8 D4.1 39.025,24.95 38.371,25.604 37.896,25.604 v1(37.8,25.7) ; v1(35,36.3) R9.2 35.175,35.2 35.875,34.5 J3.A12/B1 ; v1(36.3,14.4) C15.1 ; v1(37.6,8.4) 37.65,8.45 38.45,8.45 39.113,9.112 ; v1(37.9,22.7) C12.1 ; v1(38.1,20.8) 39.1,20.8 ; v1(40.3,14.4) 40.3,15.1 C13.1 ; 3.9,14.225 4.453,13.672 U6.1 U6.1@4.494,12.6 ; 3.9,14.225 3.925,14.225 4.8,15.1 4.8,18.75 S1.3@4.6,18.95 ; U6.1@4.494,12.6 4.703,12.391 4.703,12.022 5.312,11.413 ; S1.3@4.6,18.95 8.9,18.95 8.925,18.975 9,18.975 9.5,19.475 C3.1 ; C3.1 10,19.05 10,18.78 10.855,17.925 11.1,17.925 D1.1 D1.1@11.6,17.525
  Top Layer w1: R7.1 38.7,9.525 39.113,9.112 39.915,8.31 U3.1 ; C12.1 39.1,20.8 39.1,19.4 40.575,17.925 40.65,17.925 40.8,17.775 C14.1
  other v2: 20.327,20.25 21.427,20.25 22.527,20.25 23.627,20.25 21.427,21.35 22.527,21.35 23.627,21.35 24.727,21.35 20.327,22.45 21.427,22.45 22.527,22.45 23.627,22.45 24.727,22.45 20.327,23.55 21.427,23.55 22.527,23.55 23.627,23.55 24.727,23.55 21.427,24.65 22.527,24.65 23.627,24.65 24.727,24.65
IMU_INT1: U1.45 U2.4 | length 35.8
  Top Layer w0.2: v1(10.25,36.85) 10.088,36.85 9.707,36.47 9.625,36.47 9.625,29.675 10.475,28.825 15.475,28.825 16.9,30.25 20.75,30.25 21.675,29.325 21.675,27.113 21.277,26.715 U1.45 ; U2.4 v1(16.7,38.35)
  Bottom Layer w0.2: v1(10.25,36.85) 10.25,39.075 10.75,39.575 16.225,39.575 16.7,39.1 v1(16.7,38.35)
IMU_INT2: U1.46 U2.9 | length 28.2
  Top Layer w0.2: U2.9 9.875,37.85 9.25,37.225 9.25,29.45 10.325,28.375 15.725,28.375 17.2,29.85 20.525,29.85 21.3,29.075 21.3,27.2 20.777,26.677 U1.46
IMU_SCL: R2.2 TP3.1 U1.42 U2.13 | length 19.7
  Top Layer w0.2: U2.13 13.9,36.05 14.625,35.325 TP3.1 14.625,32.625 R2.2 v1(14.6,31.05) ; U1.42 22.777,29.6 23.2,30.023 23.2,30.996 v1(23.204,31)
  Bottom Layer w0.2: v1(14.6,31.05) 14.625,31.025 23.179,31.025 v1(23.204,31)
IMU_SDA: R1.2 TP2.1 U1.43 U2.14 | length 17.3
  Top Layer w0.2: U2.14 14.4,36.425 15.475,35.35 17.2,35.35 TP2.1 R1.2 21.925,32.625 22.45,32.1 22.45,26.663 22.352,26.565 22.352,26.427 22.302,26.377 22.302,26.002 U1.43
IMU_SDO: U1.41 U2.1 | length 18
  Top Layer w0.2: U2.1 15.175,36.85 15.2,36.825 15.2,36.5 15.8,35.9 18.6,35.9 19.4,35.1 19.4,34.1 20.5,33 22.8,33 24.2,31.6 24.2,29.7 23.3,28.8 23.3,26 U1.41
MCU_ANTI_TAMP: R3.1 U1.2 | length 19.3
  Top Layer w0.25: v1(7.7,17.4) 9.3,17.4 R3.1 ; v1(17.8,24.2) 17.896,24.2 18.396,24.7 U1.2
  Bottom Layer w0.25: v1(7.7,17.4) 7.849,17.4 8.049,17.2 16.1,17.2 17.8,18.9 v1(17.8,24.2)
MCU_BOOT0: R5.2 U1.44 | length 22
  Top Layer w0.2: v1(7.5,26.9) 7.5,25.575 R5.2 ; v1(11,29.9) 11.025,29.875 11.725,29.875 12.125,29.475 15.425,29.475 16.575,30.625 20.975,30.625 22.05,29.55 22.05,27.025 21.777,26.752 U1.44
  Bottom Layer w0.2: v1(7.5,26.9) 7.615,27.015 8.115,27.015 v1(11,29.9)
MCU_JTCLK: J2.4 U1.37 | length 17
  Top Layer w0.2: U1.37 25.277,28.277 27,30 27,39.615 26,40.615 J2.4
MCU_JTD0: J2.3 U1.39 | length 12.1
  Top Layer w0.2: U1.39 24.277,28.277 26,30 J2.3
MCU_JTDI: U1.38
MCU_JTMS: J2.5 U1.34 | length 17.1
  Top Layer w0.2: U1.34 26.926,24.2 27.049,24.323 27.405,24.323 27.466,24.384 28.984,24.384 30.1,25.5 30.1,29.89 28.54,31.45 J2.5
MCU_JTRST: J2.2 U1.40 | length 16.7
  Top Layer w0.2: J2.2 23.46,40.615 24.7,39.375 24.7,29.5 23.777,28.577 U1.40
MCU_LED_A: D2.2 U1.26 | length 2.1
  Top Layer w0.25: U1.26 28.05,20.2 D2.2@28.1,20.15
MCU_NRST: C3.2 R6.2 S2.1 U1.7 | length 24.6
  Top Layer w0.2: S2.1 2.7,29.3 v1(2.7,27.3) ; v1(11.1,21) C3.2 12.163,19.55 13.313,20.7 14,20.7 R6.2 14.575,21.1 15.075,21.6 15.1,21.6 15.7,22.2 U1.7
  Bottom Layer w0.2: v1(2.7,27.3) 4.1,27.3 5.7,25.7 5.7,23.8 8.385,21.115 10.985,21.115 v1(11.1,21)
MCU_OSC_IN: U1.5 Y1.3 | length 4.8
  Top Layer w0.2: Y1.3 15.775,24.1 16.7,24.1 17.575,23.225 18.975,23.225 U1.5
MCU_PA1: J1.1 U1.11 | length 21.9
  Top Layer w0.2: J1.1 17.58,4.135 17.045,3.6 15.75,3.6 14.35,5 14.35,14.4 17.85,17.9 17.85,19.65 18.375,20.175 18.975,20.175 U1.11
MCU_PA2: J1.3 U1.12 | length 23.4
  Top Layer w0.2: U1.12 18.975,19.675 18.475,19.675 18.275,19.475 18.275,17.7 14.725,14.15 14.725,6.807 14.842,6.69 18.339,6.69 19.053,5.976 19.053,3.817 19.17,3.7 19.585,3.7 20.12,4.235 J1.3
MCU_PA3: J1.5 U1.13 | length 22.9
  Top Layer w0.2: U1.13 19.756,18.902 19.756,18.331 15.125,13.7 15.125,7.4 15.45,7.075 20.494,7.075 21.279,6.29 22.125,6.29 22.66,5.755 J1.5
MCU_PA4: J1.2 U1.14 | length 12.2
  Top Layer w0.2: J1.2 15.6,11.48 15.6,13.575 20.277,18.252 U1.14
MCU_PA5: J1.4 U1.15 | length 13.7
  Top Layer w0.2: J1.4 20.12,10.607 18.627,12.1 17,12.1 16.45,12.65 16.45,13.75 20.777,18.077 U1.15
MCU_PA6: J1.7 U1.16 | length 19.3
  Top Layer w0.2: U1.16 21.277,17.977 19.05,15.75 19.05,13.575 21.15,11.475 21.15,7.325 21.667,6.808 23.542,6.808 24.06,6.29 24.665,6.29 25.2,5.755 J1.7
MCU_PA7: J1.9 U1.17 | length 21.2
  Top Layer w0.2: U1.17 21.777,17.912 19.575,15.71 19.575,13.65 21.575,11.65 21.575,7.55 21.925,7.2 25.449,7.2 26.359,6.29 27.205,6.29 27.74,5.755 J1.9
MCU_PA8: J1.6 U1.29 | length 24.7
  Top Layer w0.2: J1.6 23.195,10.035 23.195,11.745 23.825,12.375 28.075,12.375 32.25,16.55 32.25,21.5 32.05,21.7 U1.29
MCU_PA9: J1.8 U1.30 | length 23.7
  Top Layer w0.2: J1.8 25.708,10.008 25.708,11.808 25.825,11.925 28.375,11.925 32.65,16.2 32.65,21.825 32.35,22.125 26.875,22.125 26.8,22.2 U1.30
MCU_PA10: J1.10 U1.31 | length 22
  Top Layer w0.2: U1.31 26.079,22.675 26.75,22.675 26.9,22.525 32.575,22.525 33.05,22.05 33.05,16.015 27.74,10.705 J1.10
NetC2_2: C2.2 U1.22 | length 3.6
  Top Layer w0.25: C2.2 22.475,16.6 23,17.125 23,17.6 23.3,17.9 24,17.9 24.277,18.177 U1.22
NetD1_2: D1.2 R3.2 | length 2.3
  Top Layer w0.3: R3.2 9.525,15.825 11.1,15.825 D1.2
NetD2_1: D2.1 R4.2 | length 1.9
  Top Layer w0.25: D2.1@28.1,18.05 29.95,18.05 R4.2@30,18.1
NetD3_2: D3.2 R7.2 | length 2.4
  Top Layer w0.3: D3.2 38.6,17.5 R7.2
NetR5_1: R5.1 S1.1 | length 4.8
  Top Layer w0.2: S1.1 4.55,23.3 4.55,22.8 5.075,22.275 6.5,22.275 7.267,23.042 7.267,23.442 R5.1
NetTP1_1: TP1.1 U1.6 | length 2.8
  Top Layer w0.2: TP1.1 16.707,22.793 17.089,22.793 17.181,22.7 U1.6
NetU4_4: U4.4 U5.2 | length 4
  Top Layer w0.2: U5.2 7.203,7.653 7.6,8.05 8.35,8.05 8.75,8.45 8.75,9.558 U4.4
NetU5_4: U5.4 U6.2 | length 13.2
  Top Layer w0.2: U6.2 2.95,12.638 2.95,11.425 3.425,10.95 4.8,10.95 5.675,10.075 5.675,5.75 6.65,4.775 8.25,4.775 8.703,4.322 U5.4
USB_CC1: J3.A5 R8.1 | length 2.3
  Top Layer w0.3: R8.1 35.35,29.75 35.825,29.75 36.125,30.05 J3.A5
USB_CC2: J3.B5 R9.1 | length 2.2
  Top Layer w0.25: R9.1 35.35,33.05 J3.B5
USB_D_N: J3.A7 J3.B7 U1.32 | length 20.2
  Top Layer w0.25: U1.32 26.602,23.2 26.657,23.255 27.038,23.255 27.158,23.135 ; 35.5,30.5 35.62,30.62 36.161,30.62 36.206,30.575 36.416,30.575 37.016,30.575 J3.B7 37.066,30.575 37.95,30.575 38.275,30.9 38.275,31.126 37.876,31.525 37.066,31.525 J3.A7
  Top Layer w0.49: 27.158,23.135 30.526,23.135 31.83,24.439 31.83,29.53 32.8,30.5 35.5,30.5
USB_D_P: J3.A6 J3.B6 U1.33 | length 19.3
  Top Layer w0.25: U1.33 26.602,23.7 26.657,23.645 27.038,23.645 27.158,23.765 ; 35.5,31.13 35.62,31.01 36.191,31.01 36.206,31.025 ; J3.A6 37.016,31.025 36.416,31.025 36.206,31.025 ; J3.B6 37.016,32.025 36.206,32.025 35.81,31.629 35.81,31.421 36.206,31.025
  Top Layer w0.49: 27.158,23.765 30.265,23.765 31.2,24.7 31.2,29.791 32.539,31.13 35.5,31.13
VBUS: C12.2 D4.2 FB1.1 J3.A4/B9 J3.A9/B4 | length 18.4
  Top Layer w0.2: J3.A4/B9 37.241,29.1 37.987,29.1 38.387,29.5 38.675,29.5 ; J3.A9/B4 37.241,33.5 37.987,33.5 38.052,33.435 38.465,33.435 39.3,32.6 39.3,30.125 38.7,29.525 ; C12.2@40.774,22.626 C12.2 C12.2@40.775,22.775
  Top Layer w0.5: 38.7,29.525 39.4,29.525 40.5,28.425 40.5,25.075 D4.2 C12.2@40.775,22.775 ; FB1.1 C12.2@40.774,22.626
pads on no net: J3.A8 J3.B8 J3.MH1 J3.MH2 J3.Shell S1. S1.4 S1.5 S1.6 S1.7 S2.2 S2.4 U1.3 U1.4 U1.10 U1.18 U1.19 U1.20 U1.21 U1.25 U1.28 U2.2 U2.3 U2.10 U2.11 U6.4

## Polygon pours and split planes (outlines as drawn)
+3V3 on Top Layer "+3V3_L01_P006" (solid, pour order 6): 33.65,18.075 33.65,16.75 34.075,16.325 34.05,16.3 34.05,8.9 36,8.9 36,12.025 35.275,12.75 35.325,12.8 35.325,16.4 34.8,16.925 34.8,18.075
GND on Top Layer "GND_L01_P005" (solid, pour order 5): 35.7,16.275 36.9,16.275 37.1,16.075 39.9,16.075 40.175,16.35 40.175,18.4 41.4,18.4 41.425,18.425 41.425,14.9 40.2,14.9 40.175,14.875 39.9,15.15 37.225,15.15 36.975,14.9 35.675,14.9
GND on Top Layer "GND_L01_P004" (solid, pour order 4): 38.5,25.5 38.5,22 39.7,22 39.7,23.6 39.6,23.7 39.6,25.5
+5V on Top Layer "+5V_L01_P002" (solid, pour order 2): 41.8,14 41.5,14 40.9,13.4 40.9,12.4 42.9,12.4 42.9,14.4 43,14.5 43,21.1 41.8,21.1
+3V3 on Top Layer "+3V3_L01_P001" (solid, pour order 1): 10.8,25.6 12.3,25.6 12.6,25.9 17.5,25.9 17.5,24.9 15.5,24.9 15.4,24.8 12.7,24.8 12.3,24.4 10.8,24.4
GND on Top Layer "GND_L01_P000" (solid, remove dead copper, pour order 0): 21.7,15.6 23.5,15.6 23.8,15.9 23.8,17.5 25,17.5 25,14.1 23.8,14.1 23.5,14.4 21.7,14.4
GND on Bottom Layer "GND_L02_P008" (solid, pour order 8): 42.46,45 cw(c42.46,42.46) 45,42.46 45,2.54 cw(c42.46,2.54) 42.46,0 2.54,0 cw(c2.54,2.54) 0,2.54 0,42.46 cw(c2.54,42.46) 2.54,45

## Silkscreen, mask and mechanical layers (free items; w line width, h text height)
Top Overlay:
  region: 3511 vertices and 2 holes, not listed, extent 30.93,3.473 34.128,8.498
  text "GND" at 27.64,44.04 h0.8
  text "RS" at 22.77,43.97 h0.8
  text "CLK" at 24.87,43.97 h0.8
  text "JTAG" at 32.146,36.754 h1.52 r90
  text "USB" at 40.354,36.654 h1.52
  text "3V" at 22.63,34.87 h1 r90
  text "DO" at 26.43,33.87 h0.8 r90
  text "JTMS" at 28.93,32.17 h0.84 r90
Mechanical 1:
  the board outline again, w0.5